# Altium PCB PCB_fcvv01.PcbDoc
Units mm, origin at the board's own origin, x right, y up, seen from the top; angles counter-clockwise.
Board outline 65.04 x 65.05 mm, 4 copper layers (Top Layer, GND_TOP, GND_BOT, Bottom Layer), stack 1.586 mm thick; 65 components, 57 nets, 269 pads, 4 vias.
Unrouted connection lines stored in the file: 144.
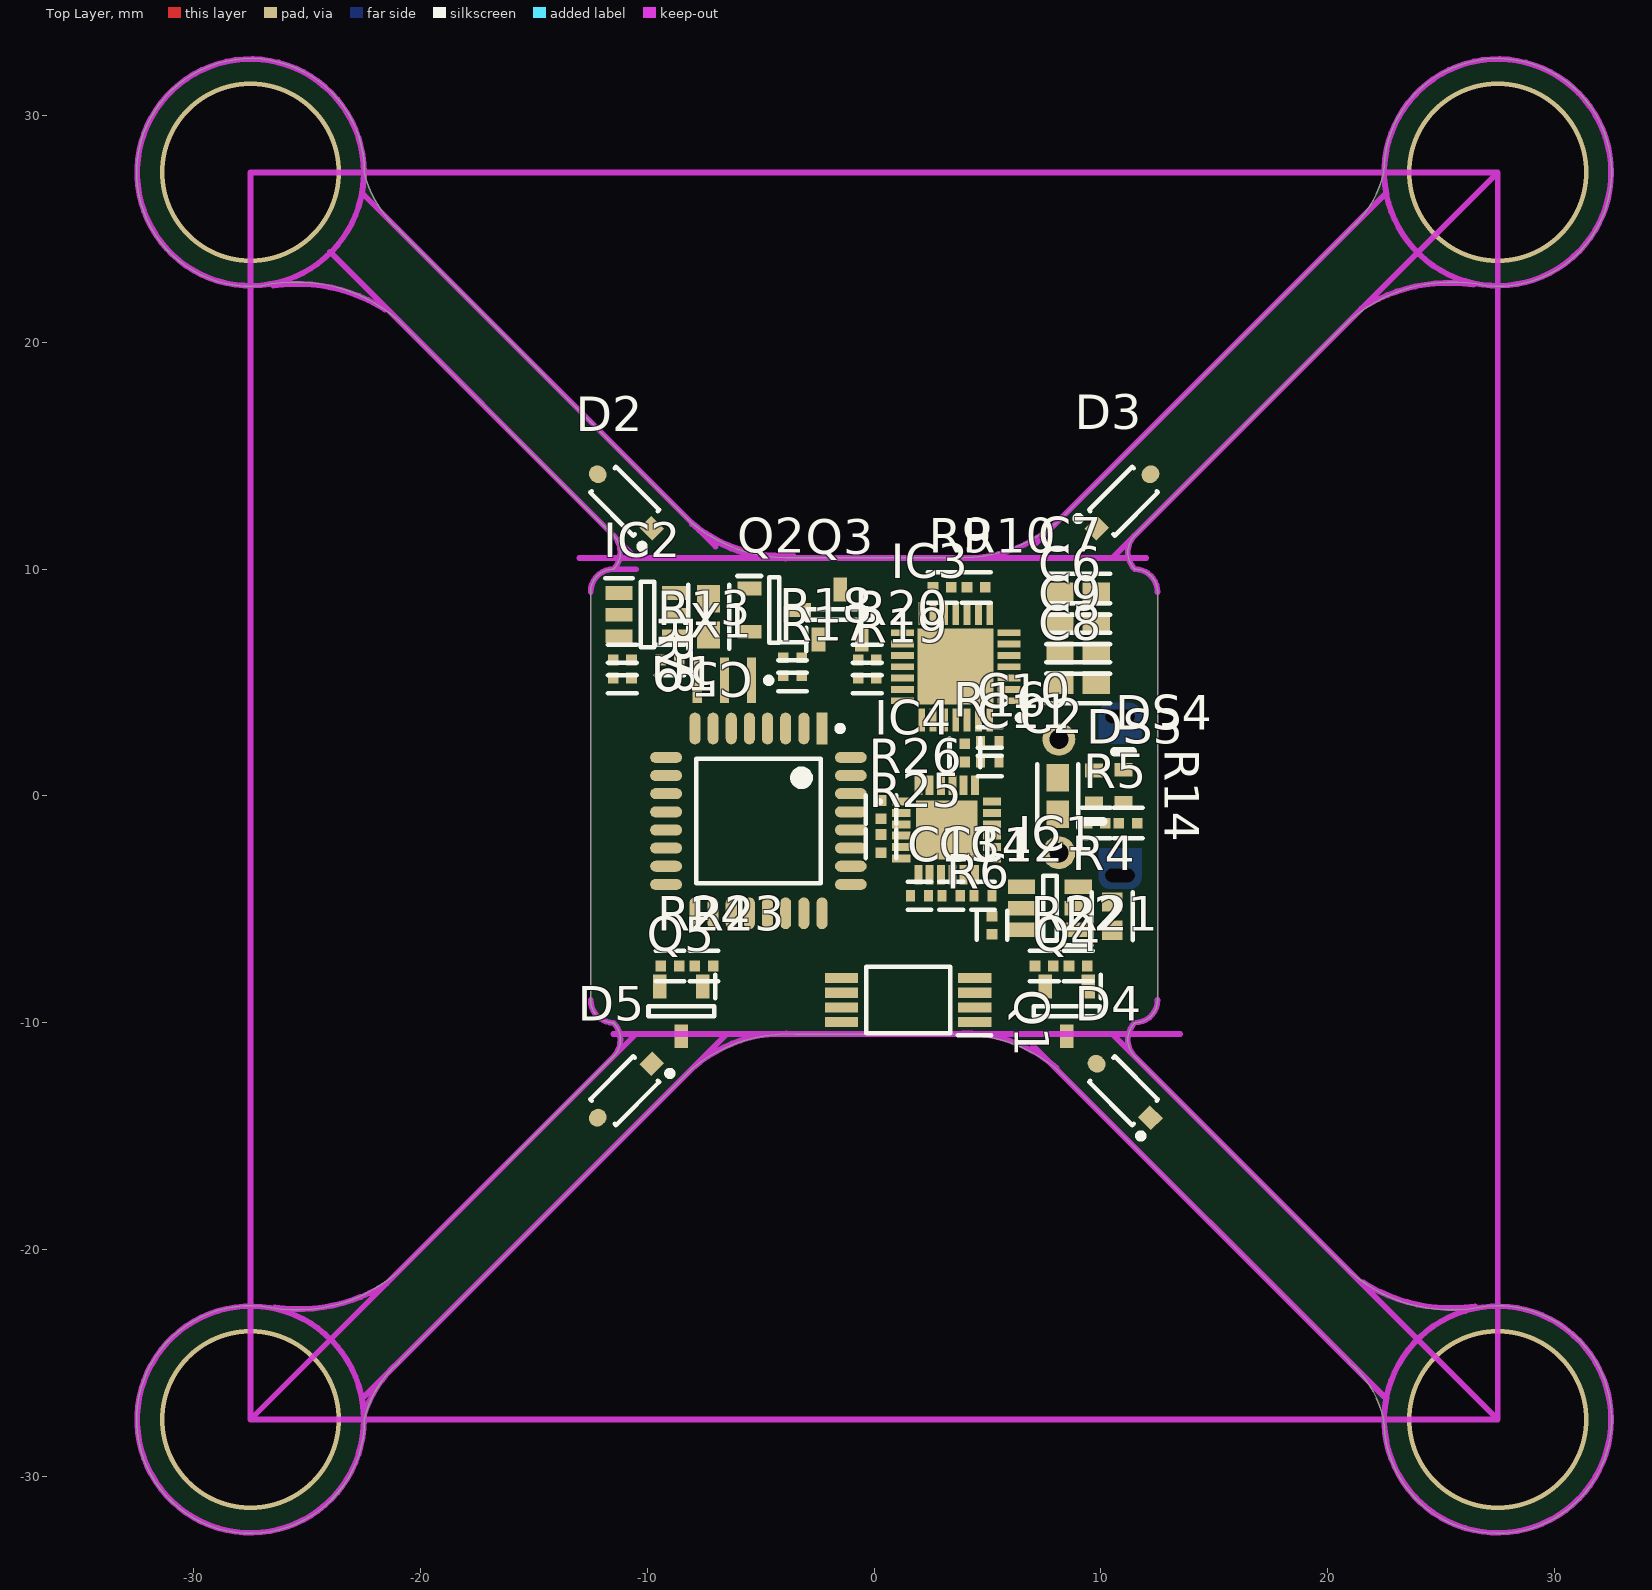
[diagram p0: Top Layer view]
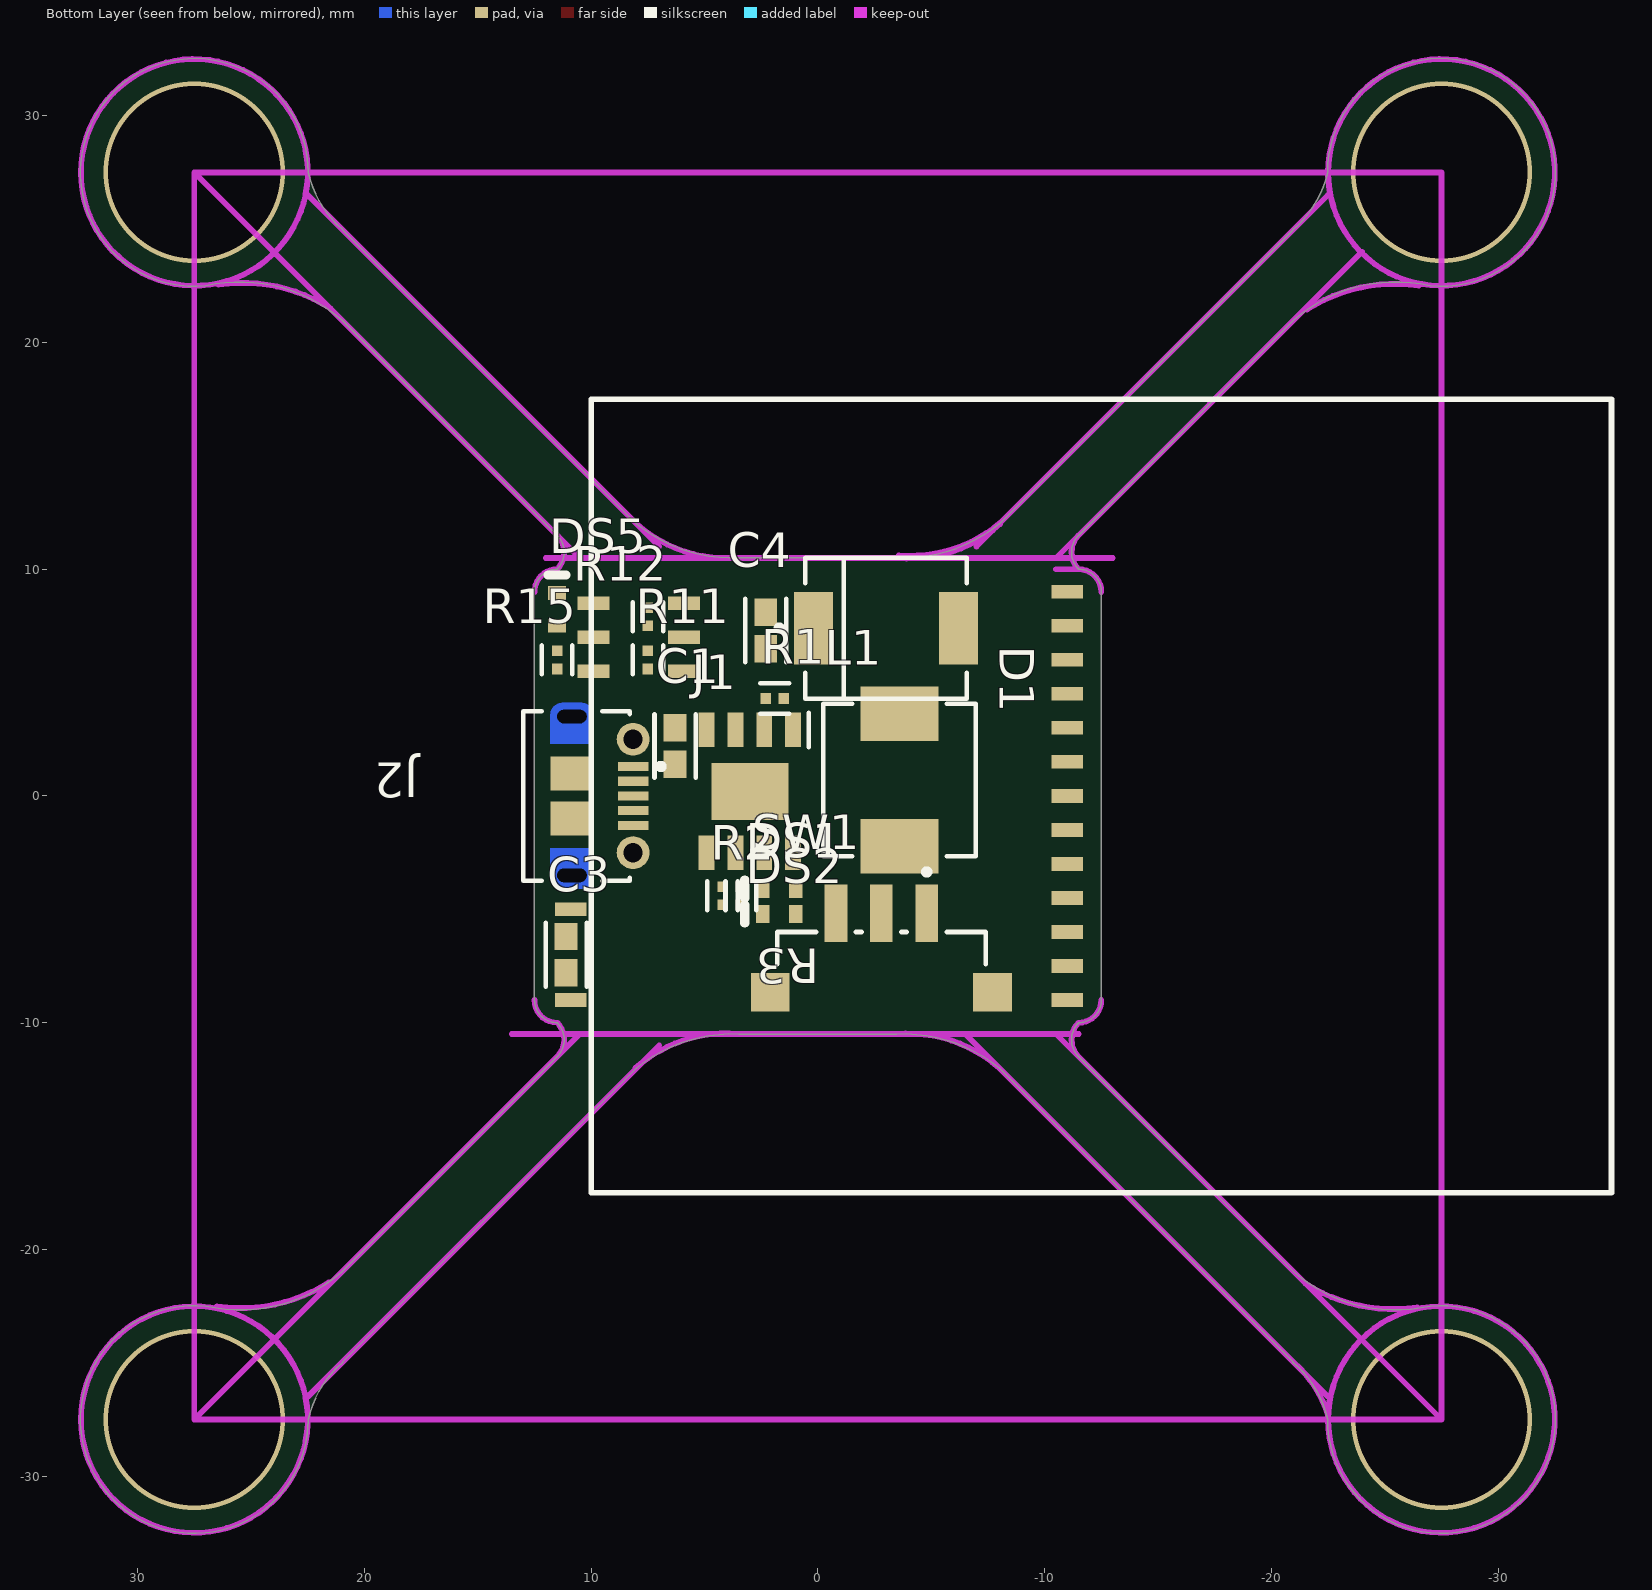
[diagram p1: Bottom Layer view, seen from below]
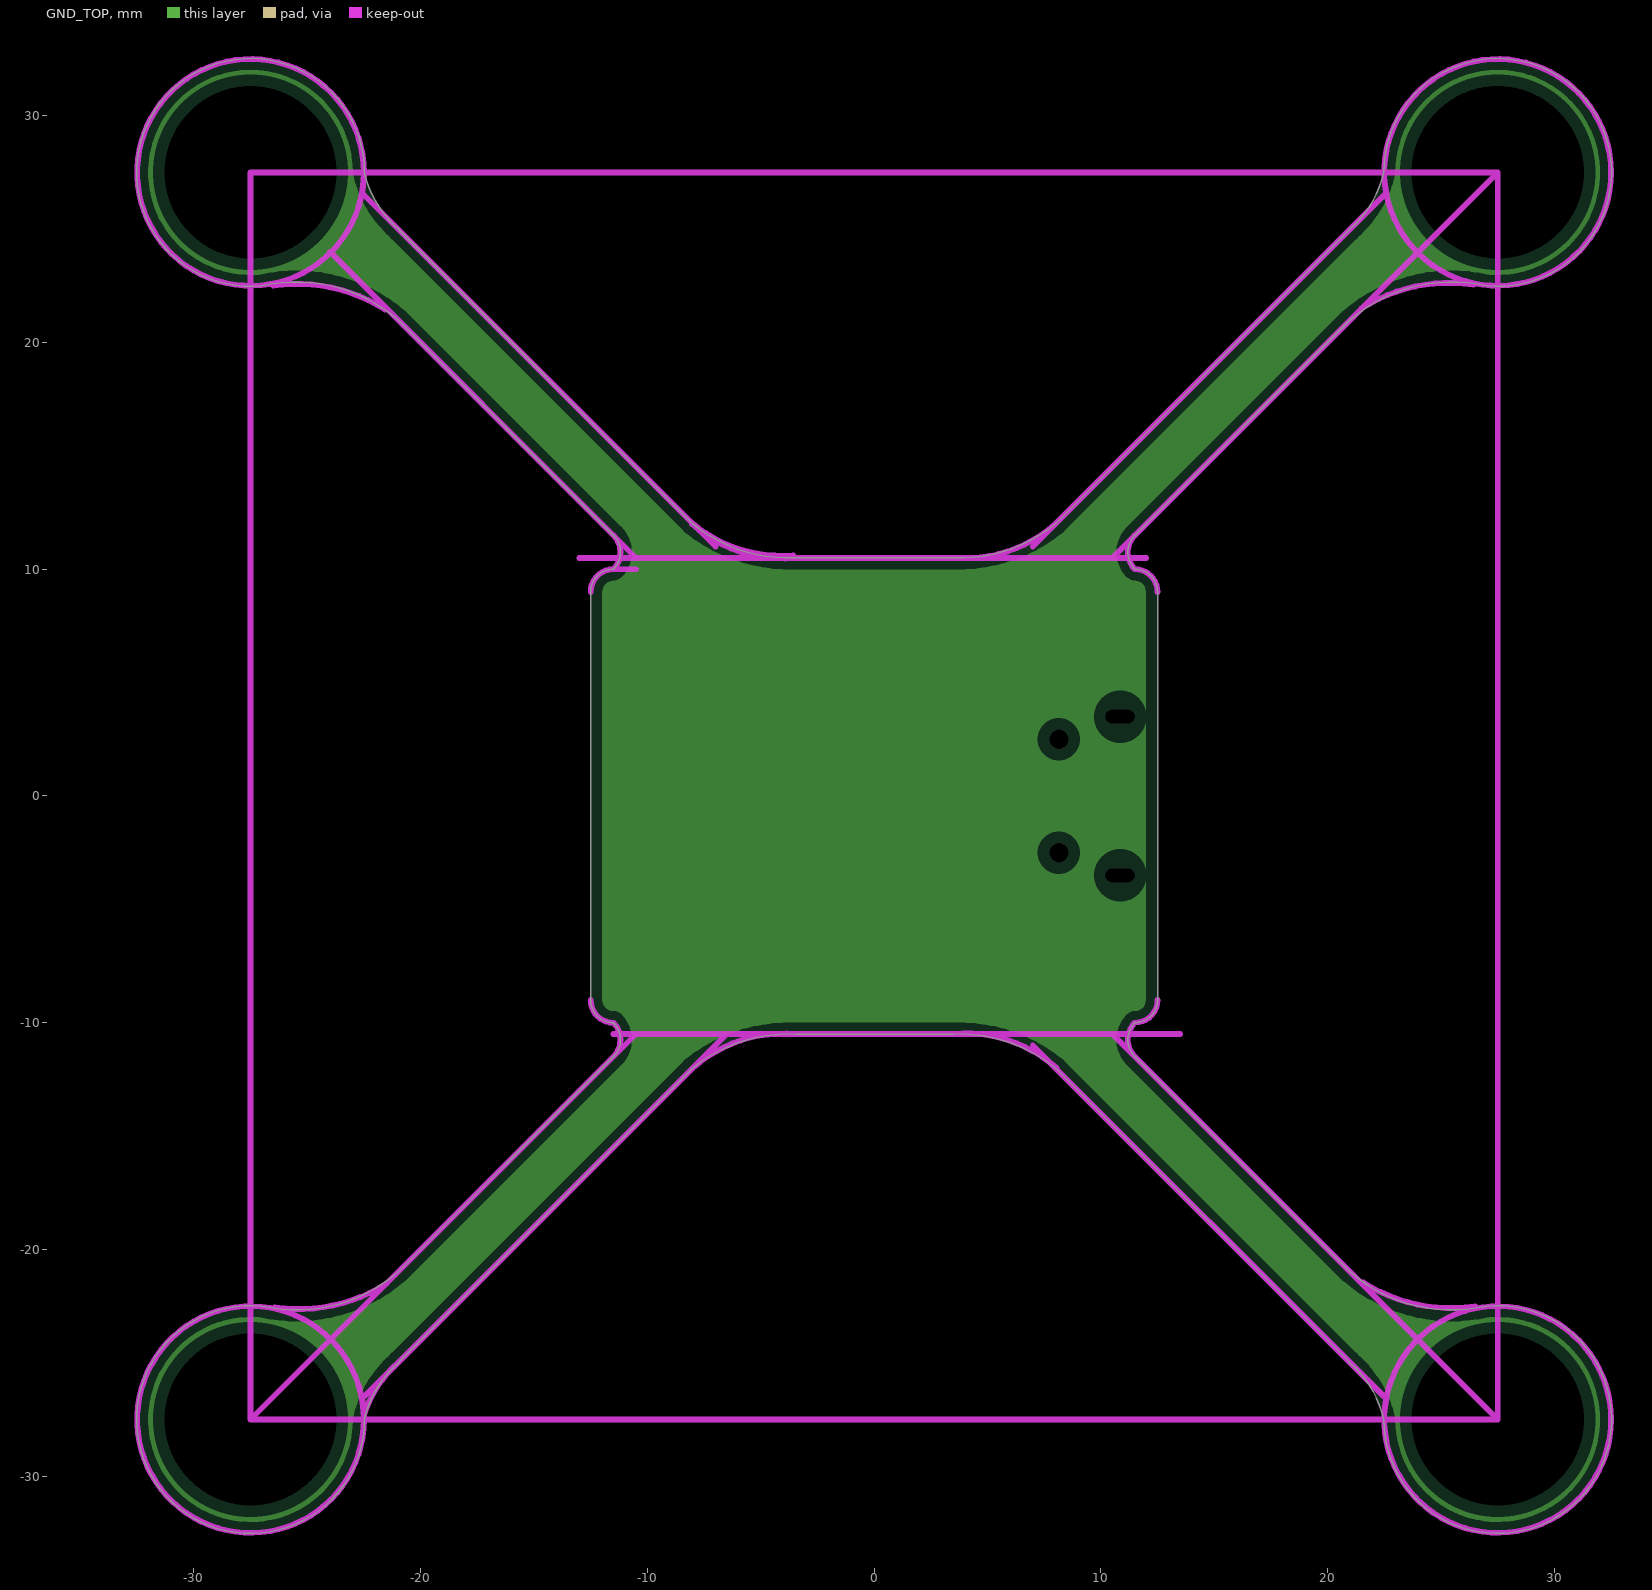
[diagram p2: GND_TOP, clearances drawn from the general rule]
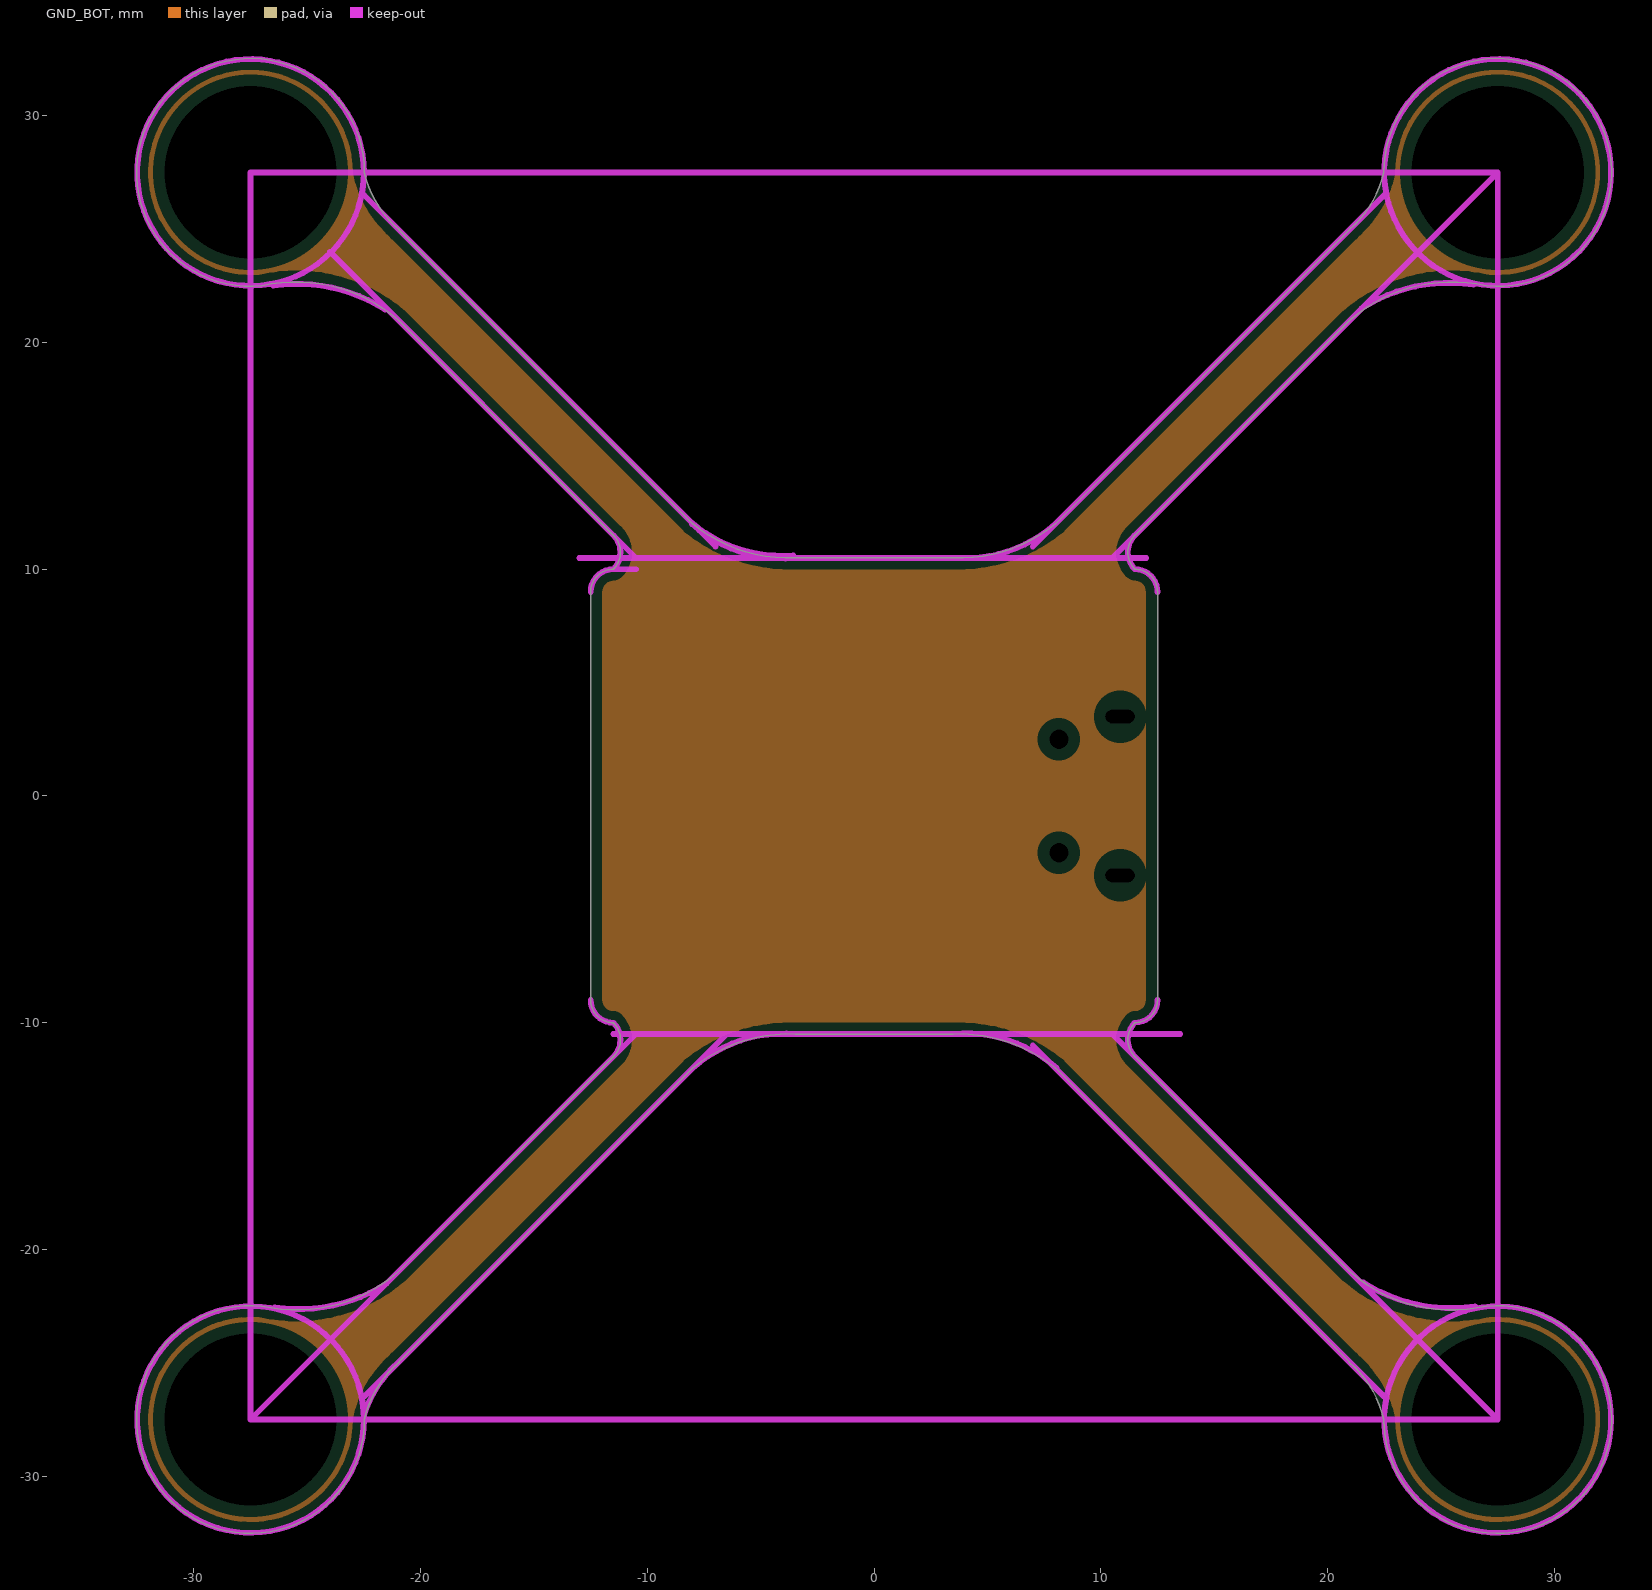
[diagram p3: GND_BOT, clearances drawn from the general rule]

## Layer stack, top to bottom
Top Solder: solder mask 0.012, Solder Resist, Dk 3.8
Top Layer: signal copper 0.035
Dielectric 2: prepreg 0.2104, PP-006, Dk 4.6
GND_TOP: plane copper 0.0152, net GND
Dielectric 1: dielectric 1.065, FR-4, Dk 4.6
GND_BOT: plane copper 0.0152, net GND
Dielectric 3: prepreg 0.2104, PP-006, Dk 4.6
Bottom Layer: signal copper 0.035
Bottom Solder: solder mask 0.012, Solder Resist, Dk 3.8

## Board outline
-27,-22.5 ccw(c-27.5,-27.5) -22.475,-27.5 cw(c-17.988,-28.488) -20.945,-24.971 -20.945,-24.945 -8,-12 cw(c-3.75,-17.25) -3.48,-10.501 3.48,-10.501 cw(c3.75,-17.25) 8,-12 20.945,-24.945 20.945,-24.971 cw(c17.988,-28.488) 22.475,-27.5 ccw(c27.5,-27.5) 27,-22.5 cw(c25.488,-15.804) 21.001,-20.999 21,-21 11.5,-11.5 cw(c12.25,-10.75) 11.5,-10 ccw(c11.5,-9) 12.5,-9 12.5,9 ccw(c11.5,9) 11.5,10 cw(c12.25,10.75) 11.5,11.5 21,21 21.001,20.999 cw(c25.488,15.804) 27,22.5 ccw(c27.5,27.5) 22.475,27.5 cw(c17.988,28.488) 20.945,24.971 20.945,24.945 8,12 cw(c3.75,17.25) 3.48,10.501 -3.48,10.501 cw(c-3.75,17.25) -8,12 -20.945,24.945 -20.945,24.971 cw(c-17.988,28.488) -22.475,27.5 ccw(c-27.5,27.5) -27,22.5 cw(c-25.488,15.804) -21.001,20.999 -21,21 -11.5,11.5 cw(c-12.25,10.75) -11.5,10 ccw(c-11.5,9) -12.5,9 -12.5,-9 ccw(c-11.5,-9) -11.5,-10 cw(c-12.25,-10.75) -11.5,-11.5 -21,-21 -21.001,-20.999 cw(c-25.488,-15.804)

## Design rules (kind name [scope] priority, off if disabled: settings)
Clearance [All] p1: gap=0.254 ignorepadtopadclearanceinfootprint=FALSE except(0: Arc-Hole Track-Hole SMDPad-Hole THPad-Hole Via-Hole Fill-Hole Poly-Hole Region-Hole Text-Hole; 0.1: Arc-Arc Arc-Track Track-Track; 0.127: SMDPad-SMDPad; 0.15: Arc-Text Track-Text SMDPad-Text THPad-Text Via-Text Fill-Text Poly-Text Region-Text Text-Text; 0.2: Arc-THPad Track-THPad)
PlaneClearance [All] p1: clearance=0.508
PlaneConnect [All] p1: planeconnectstyle=Direct reliefexpansion=0.508 reliefentries=4 reliefconductorwidth=0.254 reliefairgap=0.254
PolygonConnect [All] p1: connectstyle=Relief reliefconductorwidth=0.254 reliefentries=4 polygonreliefangle="90 Angle" airgapwidth=0.254
RoutingVias [All] p1: holewidth=0.3 width=0.6 viastyle="Through Hole" minholewidth=0.2 minwidth=0.4 maxholewidth=0.3 maxwidth=0.6
SolderMaskExpansion [All] p1: expansion=0.102 istentingtop=FALSE
Width HF_Signal [InNet('3V3')] p1: maxlimit=0.355 minlimit=0.355 preferedwidth=0.355 impedanceprofiledriven=TRUE impedanceprofileid={313EAB53-34BB-4FBF-9EF5-5980CF7794D0} impedanceprofilevalue=50.000000 minimp=50.000000 maximp=50.000000 favimp=50.000000
Width Power [(InNet('BAT') AND InNet('GND') AND InNet('NetD1_1') AND InNet('NetD2_1') AND InNet('NetR4_2') AND InNet('VBUS') AND InNet('VBUS_INT'))] p2: maxlimit=0.3 minlimit=0.3 preferedwidth=0.3
Width [(InNet('CHR_CHR') AND InNet('CHR_SBY') AND InNet('3V3'))] p3: maxlimit=0.2 minlimit=0.1 preferedwidth=0.12 minimp=50.000000 maximp=50.000000 favimp=50.000000
28 further rules are at their usual default settings.

## Classes and differential pairs
net class small_power_signal: CHR_CHR CHR_PROG CHR_SBY NetDS1_2 NetDS2_2 NetDS3_2 PROT_CS PROT_OC PROT_OD uC_DTR uc_IND_1 uc_IND_2 uc_RESET
net class Power: 3V3 BAT_N BAT_P GND MOTOR_NEG_1 MOTOR_NEG_2 MOTOR_NEG_3 MOTOR_NEG_4 NetC14_2

## Components (designator, comment, footprint, x,y, rotation, side; value= is the part's Value field where it differs from the comment)
C1 "10uF" FP-GRM188-0_1-e0_2_0_55-IPC_A 6.3,2.2 r270 bottom
C2 "10uF" FP-GRM188-0_1-e0_2_0_55-IPC_A 8.1,0 r90 top
C3 "10uF" FP-GRM188-0_1-e0_2_0_55-IPC_A 11.1,-7 r90 bottom
C4 "22uF" FP-GRM188-0_1-e0_2_0_55-IPC_A 2.3,7.3 r270 bottom
C5 "22uF" FP-GRM188-0_1-e0_2_0_55-IPC_A -7.3,7.9 r90 top
C6 "4.7uF" FP-GRM188-0_1-e0_2_0_55-IPC_A 9,7.6 r0 top
C7 "0.1uF" FP-GRM188-0_1-e0_2_0_55-IPC_A 9,8.9 r0 top
C8 "4.7uF" FP-GRM188-0_1-e0_2_0_55-IPC_A 8.998,5 r0 top
C9 "0.1uF" FP-GRM188-0_1-e0_2_0_55-IPC_A 9,6.3 r0 top
C10 "0.1uF" FP-GRM15-MFG 5.1,2.4 r0 top value=0.10μF
C11 "2.2uF" FP-GRM15-MFG 5.1,1.5 r0 top value=0.10μF
C12 "0.1uF" FP-GRM15-MFG 4.8,-4.4 r0 top value=0.10μF
C13 "10nF" FP-GRM15-MFG 2,-4.4 r0 top value=0.10μF
C14 "0.1uF" FP-GRM15-MFG 3.4,-4.4 r180 top value=0.10μF
D1 "SS34-E3/57T" FP-95402-MFG -3,7.4 r180 bottom
D2 "1N58419" FP-425-04-IPC_C -11,13 r135 top
D3 "1N58419" FP-425-04-IPC_C 11,13 r45 top
D4 "1N58419" FP-425-04-IPC_C 11,-13 r135 top
D5 "1N58419" FP-425-04-IPC_C -11,-13 r225 top
DS1 "GREEN" VISH-TLMX1100_V 1.7,-4.1 r0 bottom
DS2 "RED" VISH-TLMX1100_V 1.7,-5.2 r0 bottom
DS3 "RED" VISH-TLMX1100_V 9.7,0.4 r270 top
DS4 "RED" VISH-TLMX1100_V 11,0.425 r90 top
DS5 "RED" VISH-TLMX1100_V 11.5,8.225 r90 bottom
IC1 "DW01A-G" SOT95P280X135-6N 7.75,-4.95 r180 top
IC2 "MT3608" SOT95P280X145-6N -10,8 r0 top
IC3 "CP2102" QFN50P500X500X100-29N-D 3.6,5.7 r180 top
IC4 "MPU-6050" MPU6050 3.2,-1.5 r0 top
J1 "TP4056" SOIC127P600X175-9N 3,0.2 r270 bottom
J2 "105017-0001" USB-MICRO-B_V 9.5,0 r270 bottom locked
L1 "IHLP2525CZER220M11" FP-IHLP-2525CZ-FP_2_413x3-MFG -3.6,0.7 r90 bottom
Q1 "FS8205A" SOP65P640X120-8N 1.5,-9 r180 top
Q2 "SI2302DS" SOT95P230X110-3N -4.4,8.2 r0 top
Q3 "SI2302DS" SOT95P230X110-3N -1.5,8 r90 top
Q4 "SI2302DS" SOT95P230X110-3N 8.5,-9.5 r270 top
Q5 "SI2302DS" SOT95P230X110-3N -8.5,-9.5 r270 top
R1 "2K" FP-CRCW0402-e3-IPC_C 1.9,4.3 r180 bottom
R2 "220R" FP-CRCW0402-e3-IPC_C 4.2,-4.4 r270 bottom
R3 "220R" FP-CRCW0402-e3-IPC_C 3.4,-4.4 r270 bottom
R4 "2K" FP-ERA3A-IPC_C 10.5,-5.3 r90 top
R5 "220R" FP-CRCW0402-e3-IPC_C 9.8,-1.2 r180 top
R6 "470R" FP-CRCW0402-e3-IPC_C 5.2,-5.7 r90 top
R7 "7.5K" FP-CRCW0402-e3-IPC_C -11.1,6 r0 top
R8 "1K" FP-CRCW0402-e3-IPC_C -11.1,5.2 r0 top
R9 "22.1K" FP-CRCW0402-e3-IPC_C 3.002,9.2 r180 top
R10 "47.5K" FP-CRCW0402-e3-IPC_C 4.5,9.2 r0 top
R11 "1K" FP-CRCW0402-e3-IPC_C 7.5,6 r270 bottom
R12 "1K" FP-CRCW0402-e3-IPC_C 7.5,7.902 r90 bottom
R13 "1K" FP-CRCW0402-e3-IPC_C -9,6 r0 top
R14 "220R" FP-CRCW0402-e3-IPC_C 11.2,-1.2 r0 top
R15 "220R" FP-CRCW0402-e3-IPC_C 11.5,6 r90 bottom
R16 "10K" FP-CRCW0402-e3-IPC_C 4,1.9 r270 top
R17 "500R" FP-CRCW0402-e3-IPC_C -3.6,5.3 r180 top
R18 "47.5K" FP-CRCW0402-e3-IPC_C -3.598,6.1 r180 top
R19 "500R" FP-CRCW0402-e3-IPC_C -0.3,5.2 r180 top
R20 "47.5K" FP-CRCW0402-e3-IPC_C -0.3,6 r180 top
R21 "500R" FP-CRCW0402-e3-IPC_C 9,-7.5 r0 top
R22 "47.5K" FP-CRCW0402-e3-IPC_C 7.5,-7.5 r0 top
R23 "500R" FP-CRCW0402-e3-IPC_C -7.5,-7.5 r0 top
R24 "47.5K" FP-CRCW0402-e3-IPC_C -9,-7.5 r0 top
R25 "4.7k" FP-CRCW0402-e3-IPC_C 0.3,-2.1 r90 top
R26 "4.7k" FP-CRCW0402-e3-IPC_C 0.3,-0.6 r270 top
SW1 "SS312SAH4-R" FP-SS312SAH4-R-MFG -2.8,-8 r90 bottom
U1 "ATMEGA328P-AUR" FP-32A-IPC_C -5.1,-1.1 r270 top
X1 "CSTCE8M00G55-R0" MURA-CSTCE_G_A-3_V -6.6,5.1 r180 top

## Footprints (in the part's own frame and the unit in brackets; to place one, negate y for a bottom-side part, rotate by r counter-clockwise, add the part's x,y. Pads: shape width x height; smd on the part's side, far side on the other; paste and mask are expansions set on the pad)
FP-32A-IPC_C [mm]
  rect 1.404x0.486 smd paste+0 mask+0: 1(-4.075,2.8)
  rrect100% 1.404x0.486 smd paste+0 mask+0: 2(-4.075,2) 3(-4.075,1.2) 4(-4.075,0.4) 5(-4.075,-0.4) 6(-4.075,-1.2) 7(-4.075,-2) 8(-4.075,-2.8) 17(4.075,-2.8) 18(4.075,-2) 19(4.075,-1.2) 20(4.075,-0.4) 21(4.075,0.4) 22(4.075,1.2) 23(4.075,2) 24(4.075,2.8)
  rrect100% 0.486x1.404 smd paste+0 mask+0: 9(-2.8,-4.075) 10(-2,-4.075) 11(-1.2,-4.075) 12(-0.4,-4.075) 13(0.4,-4.075) 14(1.2,-4.075) 15(2,-4.075) 16(2.8,-4.075) 25(2.8,4.075) 26(2,4.075) 27(1.2,4.075) 28(0.4,4.075) 29(-0.4,4.075) 30(-1.2,4.075) 31(-2,4.075) 32(-2.8,4.075)
  silkscreen extent -4.2,-2.75 2.75,3.73, body extent -4.88,-4.88 4.88,4.88, height 0.25
FP-425-04-IPC_C [mm]
  rect 0.808x0.742 smd paste+0 mask+0: 1(-1.68,0)
  rrect100% 0.808x0.742 smd paste+0 mask+0: 2(1.68,0)
  silkscreen extent -2.07,-0.8 1.35,1, body extent -2.18,-0.9 2.18,0.9, height 0.25
FP-95402-MFG [mm]
  rect 1.72x3.2 smd paste+0 mask+0: 1(-3.205,0) 2(3.205,0)
  silkscreen extent -4.83,-3.11 3.55,3.11, body extent -3.97,-2.95 3.97,2.95, height 2.62
FP-CRCW0402-e3-IPC_C [mm]
  rect 0.468x0.472 smd paste+0 mask+0: 1(-0.402,0) 2(0.402,0)
  silkscreen extent -0.64,-0.67 0.64,0.67, body extent -0.5,-0.25 0.5,0.25, height 0.4
FP-ERA3A-IPC_C [mm]
  rect 0.855x0.906 smd paste+0 mask+0: 1(-0.626,0) 2(0.626,0)
  silkscreen extent -1.05,-0.9 1.05,0.9, body extent -0.8,-0.4 0.8,0.4, height 0.55
FP-GRM15-MFG [mm]
  rect 0.4x0.5 smd paste+0 mask+0: 1(-0.4,0) 2(0.4,0)
  silkscreen extent -0.53,-0.63 0.53,0.63, body extent -0.7,-0.38 0.7,0.38, height 0.25
FP-GRM188-0_1-e0_2_0_55-IPC_A [mm]
  rect 1.208x1.012 smd paste+0 mask+0: 1(-0.802,0) 2(0.802,0)
  silkscreen extent -1.41,-0.91 1.41,0.91, body extent -0.8,-0.4 0.8,0.4, height 0.9
FP-IHLP-2525CZ-FP_2_413x3-MFG [mil]
  rect 95x135 smd paste+0 mask+0: 1(-115,0) 2(115,0)
  silkscreen extent -132,-132 132,132, body extent -135,-127 135,127, height 118
FP-SS312SAH4-R-MFG [mm]
  rect 2.55x1 smd paste+0 mask+0: 1(2.825,-2) 2(2.825,0) 3(2.825,2)
  rect 1.7x1.7 smd paste+0 mask+0: 4(-0.65,4.9) 5(-0.65,-4.9)
  silkscreen extent 0.58,-4.6 4.77,4.6, body extent -4,-5.25 3.4,5.25, height 2.9
MPU6050 [mm]
  rect 0.8x0.35 smd: 1(-2,1.25) 2(-2,0.75) 3(-2,0.25) 4(-2,-0.25) 5(-2,-0.75) 6(-2,-1.25) 13(2,-1.25) 14(2,-0.75) 15(2,-0.25) 16(2,0.25) 17(2,0.75) 18(2,1.25)
  rect 0.35x0.85 smd: 7(-1.25,-1.975) 8(-0.75,-1.975) 9(-0.25,-1.975) 10(0.25,-1.975) 11(0.75,-1.975) 12(1.25,-1.975) 19(1.25,1.975) 20(0.75,1.975) 21(0.25,1.975) 22(-0.25,1.975) 23(-0.75,1.975) 24(-1.25,1.975)
  rect 2.7x2.6 smd: 25(0,0)
  silkscreen extent -3,1.2 -2.9,1.3, body extent -2,-2 2,2, height 0.88
MURA-CSTCE_G_A-3_V [mm] "SMD, 3-Leads, Body 3.2x1.3mm, Pitch 1.2mm"
  rect 0.4x2 smd: 1(-1.2,0) 2(0,0) 3(1.2,0)
  silkscreen extent -2.08,-0.12 -1.83,0.12, body extent -1.6,-0.65 1.6,0.65, height 0.7
QFN50P500X500X100-29N-D [mm]
  rect 1x0.3 smd: 1(-2.35,1.5) 2(-2.35,1) 3(-2.35,0.5) 4(-2.35,0) 5(-2.35,-0.5) 6(-2.35,-1) 7(-2.35,-1.5) 15(2.35,-1.5) 16(2.35,-1) 17(2.35,-0.5) 18(2.35,0) 19(2.35,0.5) 20(2.35,1) 21(2.35,1.5)
  rect 0.3x1 smd: 8(-1.5,-2.35) 9(-1,-2.35) 10(-0.5,-2.35) 11(0,-2.35) 12(0.5,-2.35) 13(1,-2.35) 14(1.5,-2.35) 22(1.5,2.35) 23(1,2.35) 24(0.5,2.35) 25(0,2.35) 26(-0.5,2.35) 27(-1,2.35) 28(-1.5,2.35)
  rect 3.35x3.35 smd: 29(0,0)
  silkscreen extent -2.98,2.13 -2.73,2.37, body extent -2.55,-2.55 2.55,2.55, height 1
SOIC127P600X175-9N [mm]
  rect 1.525x0.7 smd: 1(-2.712,1.905) 2(-2.712,0.635) 3(-2.712,-0.635) 4(-2.712,-1.905) 5(2.712,-1.905) 6(2.712,-0.635) 7(2.712,0.635) 8(2.712,1.905)
  rect 2.513x3.402 smd: 9(0,0)
  silkscreen extent -3.47,2.61 -1.95,2.61, body extent -3,-2.45 3,2.45, height 1.75
SOP65P640X120-8N [mm]
  rect 1.475x0.45 smd: 1(-2.938,0.975) 2(-2.938,0.325) 3(-2.938,-0.325) 4(-2.938,-0.975) 5(2.938,-0.975) 6(2.938,-0.325) 7(2.938,0.325) 8(2.938,0.975)
  silkscreen extent -3.67,-1.47 1.85,1.55, body extent -3.2,-1.47 3.2,1.47, height 1.2
SOT95P230X110-3N [mm]
  rect 1.05x0.6 smd: 1(-1.1,0.95) 2(-1.1,-0.95) 3(1.1,0)
  silkscreen extent -1.63,-1.45 0.23,1.5, body extent -1.2,-1.45 1.2,1.45, height 0.95
SOT95P280X135-6N [mm]
  rect 1.2x0.65 smd: 1(-1.25,0.95) 2(-1.25,0) 3(-1.25,-0.95) 4(1.25,-0.95) 5(1.25,0) 6(1.25,0.95)
  silkscreen extent -1.85,-1.43 0.3,1.63, body extent -1.4,-1.43 1.4,1.43, height 1.35
SOT95P280X145-6N [mm]
  rect 1.2x0.6 smd: 1(-1.25,0.95) 2(-1.25,0) 3(-1.25,-0.95) 4(1.25,-0.95) 5(1.25,0) 6(1.25,0.95)
  silkscreen extent -1.85,-1.45 0.3,1.6, body extent -1.4,-1.45 1.4,1.45, height 1.45
USB-MICRO-B_V [mm] "USB, MICRO B, Body 7.491x4.695 mm, Pitch 0.65 mm"
  rect 0.4x1.35 smd: 1(-1.3,1.35) 2(-0.65,1.35) 3(0,1.35) 4(0.65,1.35) 5(1.3,1.35)
  round 1.45 hole 0.85: 6(-2.5,1.35) 7(2.5,1.35)
  rrect50% 0x0 hole 0.6 slot 1.3 at 90 deg: 8(-3.5,-1.35) 11(3.5,-1.35)
  rect 1.5x1.9 smd: 9(-1,-1.35) 10(1,-1.35)
  Top Layer circle w0.5: c3.6,-0.9 r0.25
  Top Layer circle w0.5: c3.6,-1.8 r0.25
  Top Layer circle w0.5: c-3.6,-0.9 r0.25
  Top Layer circle w0.5: c-3.6,-1.8 r0.25
  Top Layer region: -2.3,-2.3 -2.3,-0.4 -3.6,-0.4 -3.6,-2.3
  Top Layer region: 2.3,-0.4 2.3,-2.3 3.6,-2.3 3.6,-0.4
  Top Layer region: 3.6,-0.9 3.6,-1.8 4.1,-1.8 4.1,-0.9
  Top Layer region: -3.6,-1.8 -3.6,-0.9 -4.1,-0.9 -4.1,-1.8
  silkscreen extent -3.75,-3.5 3.75,2.7, body extent -4.1,-3.9 4.1,1.5, height 2.67
VISH-TLMX1100_V [mm] "SMD, 2-Leads, Body 1.6x0.8mm"
  rect 0.6x0.8 smd: 1(-0.725,0) 2(0.725,0)
  silkscreen extent 1.53,-0.4 1.53,0.4, body extent -0.8,-0.4 0.8,0.4, height 0.65

## Part data
C1 C2: library part CMP-2006-02792-2, "10uF 0603", Case Code (Imperial)=0603, Case Code (Metric)=1608, Dielectric=X5R, Max Operating Temperature=85°C, Min Operating Temperature=-55°C, Package Quantity=4000, Tolerance=20%, Voltage=6.3V, Capacitance=10uF, Case/Package=0603, Depth=0.8mm, Height=0.8mm, Lead Free="Lead Free", Length=1.6mm, Material=Ceramic, Mount="Surface Mount", Packaging="Tape and Reel", Radiation Hardening=No, REACH SVHC="No SVHC", Termination=SMD/SMT, Thickness=0.035inch, Voltage Rating=6.3V, Voltage Rating (DC)=6.3V, Width=0.031inch
C3: library part CMP-2006-02792-2, "0603", Case Code (Metric)=1608, Dielectric=X5R, Max Operating Temperature=85°C, Min Operating Temperature=-55°C, Package Quantity=4000, Tolerance=20%, Voltage=6.3V, Capacitance=10uF, Case Code (Imperial)=0603, Case/Package=0603, Depth=0.8mm, Height=0.8mm, Lead Free="Lead Free", Length=1.6mm, Material=Ceramic, Mount="Surface Mount", Packaging="Tape and Reel", Radiation Hardening=No, REACH SVHC="No SVHC", Termination=SMD/SMT, Thickness=0.035inch, Voltage Rating=6.3V, Voltage Rating (DC)=6.3V, Width=0.031inch
C4 C5: library part CMP-2006-02792-2, "10uF 0603", Capacitance=10uF, Case Code (Imperial)=0603, Case Code (Metric)=1608, Dielectric=X5R, Max Operating Temperature=85°C, Min Operating Temperature=-55°C, Package Quantity=4000, Tolerance=20%, Voltage=6.3V, Case/Package=0603, Depth=0.8mm, Height=0.8mm, Lead Free="Lead Free", Length=1.6mm, Material=Ceramic, Mount="Surface Mount", Packaging="Tape and Reel", Radiation Hardening=No, REACH SVHC="No SVHC", Termination=SMD/SMT, Thickness=0.035inch, Voltage Rating=6.3V, Voltage Rating (DC)=6.3V, Width=0.031inch
C6 C7 C8 C9: library part CMP-2006-02792-2, "0603", Capacitance=10uF, Case Code (Metric)=1608, Dielectric=X5R, Max Operating Temperature=85°C, Min Operating Temperature=-55°C, Package Quantity=4000, Tolerance=20%, Voltage=6.3V, Case Code (Imperial)=0603, Case/Package=0603, Depth=0.8mm, Height=0.8mm, Lead Free="Lead Free", Length=1.6mm, Material=Ceramic, Mount="Surface Mount", Packaging="Tape and Reel", Radiation Hardening=No, REACH SVHC="No SVHC", Termination=SMD/SMT, Thickness=0.035inch, Voltage Rating=6.3V, Voltage Rating (DC)=6.3V, Width=0.031inch
C10 C11 C12 C13 C14: library part CMP-2100-03641-2, "CAP CER 0.1UF 16V X7R 0402", Capacitance=0.10μF, Manufacturer=Murata, Manufacturer Part Number=GRM155R71C104KA88D, Package=GRM15, Temperature="-55°C to +125°C", Temperature Characteristic=X7R, Temperature Range High=+125°C, Temperature Range Low=-55°C, Tolerance=10%, Voltage Rating=16Vdc, Category=Cap, ComponentLink2Description=Datasheet, ComponentLink2URL=https://search.murata.co.jp/Ceramy/image/img/A01X/G101/ENG/GRM155R71H471KA01-01A.pdf, Device Class L1="Passive Components", Device Class L2=Capacitors, Device Class L3="Ceramic Capacitors", Digikey Description="CAP CER 0.1UF 16V X7R 0402", Height=0.55mm, Ipc Land Pattern Name=CAPC10050X219, Lead Free=yes, Material=Ceramic, Mouser Description="0402 0.1 uF 16V ±10 % Tolerance X7R SMT Multilayer Ceramic Capacitor", Octopart=https://octopart.com/grm155r71c104ka88d-murata-196880, RoHS=TRUE, Standoff Height=0mm
D1: library part CMP-02539-000012-1, "DIODE SCHOTTKY 40V 3A DO214AB", Forward Current=3A, Manufacturer=Vishay, Max Junction Temp=+150°C, Max Repetitive Reverse Voltage=40V, Max Surge Forward Current=100A, Package=95402, Peak Reverse Current=0.5mA, Temperature="-55°C to +150°C", Temperature Range Low=-55°C, Automotive=No, Category=Diode, ComponentLink2Description=Datasheet, ComponentLink2URL=http://www.vishay.com/docs/88751/ss32.pdf, Device Class L1="Discrete Semiconductors", Device Class L2=Diodes, Device Class L3="Schottky Diodes", Digikey Description="DIODE SCHOTTKY 40V 3A DO214AB", Footprint Url=http://www.vishay.com/docs/95402/smc.pdf, Height=2.62mm, Lead Free=Yes, Manufacturer Part Number=SS34-E3/57T, Mouser Description="Schottky Diodes & Rectifiers 3.0 Amp 40 Volt", Octopart=https://octopart.com/ss34-e3%2F57t-vishay-39552907, RoHS=TRUE, Standoff Height=0mm, Temperature Range High=+150°C
D2 D3 D4 D5: library part CMP-1055-00425-2, "DIODE SCHOTTKY 20V 500MA SOD123", Average Rectified Current=500mA, Case/Package=SOD-123-2, Forward Voltage=385mV, Max Forward Surge Current (Ifsm)=5.5A, Max Operating Temperature=125°C, Max Repetitive Reverse Voltage (Vrrm)=20V, Max Reverse Leakage Current=250uA, Min Operating Temperature=-65°C, Package Quantity=3000, Contact Plating=Tin, Current Rating=500mA, Element Configuration=Single, Forward Current=500mA, Height=1.12mm, Lead Free="Lead Free", Length=2.69mm, Max Reverse Voltage (DC)=20V, Max Surge Current=5.5A, Number of Pins=2, Output Current=500mA, Packaging="Tape and Reel", Peak Non-Repetitive Surge Current=5.5A, Peak Reverse Current=250uA, Polarity=Standard, Radiation Hardening=No, REACH SVHC="No SVHC", Termination=SMD/SMT, Voltage Rating (DC)=20V, Width=1.6mm
DS1 DS2 DS3 DS4 DS5: library part CMP-1666-00027-1, "Red 0603 Light Emitting Diodes (LED) ROHS/NCD0603R1", Capacitance="12 pF", Case Code (Imperial)=0603, Case Code (Metric)=1608, Max Operating Temperature=125degC, Min Operating Temperature=-55degC, Package Quantity=4000, Resistance="100000000000 Ohm", Tolerance=5%, Type (Capacitors)=C0G, Voltage Rating="50 V", Case/Package=0603, ComponentLink1Description="Manufacturer URL", ComponentLink1URL=http://www.vishay.com/, ComponentLink2Description=Datasheet, ComponentLink2URL=http://www.vishay.com/docs/83173/tlmb1100.pdf, DatasheetVersion="Rev. 2.7, 03/2016", Height="0.8 mm", Length="1.6 mm", Mount="Surface Mount", PackageDescription="2-Pin Surface Mount Device, Body 1.6 x 0.8 mm", PackageReference=TLMX1100, Packaging="Tape and Reel", Pins=2, Radiation Hardening=No, REACH SVHC="No SVHC", RoHSCompliant=True, Voltage Rating (DC)="50 V", Width="0.8 mm"
IC1: "Integrated Circuit", Manufacturer_Name="Fortune Semiconductor Corporation", Datasheet Link=http://acoptex.com/uploads/DW01A.pdf, Height=1.35mm, Manufacturer_Part_Number=DW01A-G
IC2: "Integrated Circuit", Manufacturer_Name=Aerosemi, Datasheet Link=https://www.olimex.com/Products/Breadboarding/BB-PWR-3608/resources/MT3608.pdf, Height=1.45mm, Manufacturer_Part_Number=MT3608
IC3: "Integrated Circuit", Manufacturer_Name="Silicon Labs", Mouser Part Number=634-CP2102, Datasheet Link=https://componentsearchengine.com/Datasheets/1/CP2102.pdf, Height=1mm, Manufacturer_Part_Number=CP2102, Mouser Price/Stock=https://www.mouser.co.uk/ProductDetail/Silicon-Labs/CP2102?qs=ucY0lxHzU7615lOm95XT0w%3D%3D
IC4: "Integrated Circuit", Manufacturer_Name=TDK, Mouser Part Number=410-MPU-6050, Arrow Part Number=MPU-6050, Arrow Price/Stock=https://www.arrow.com/en/products/mpu-6050/invensense?region=nac, Datasheet Link=https://product.tdk.com/system/files/dam/doc/product/sensor/mortion-inertial/imu/data_sheet/mpu-6000-datasheet1.pdf, Height=0.95mm, Manufacturer_Part_Number=MPU-6050, Mouser Price/Stock=https://www.mouser.co.uk/ProductDetail/TDK-InvenSense/MPU-6050?qs=u4fy%2FsgLU9O14B5JgyQFvg%3D%3D
J1: "Connector", Manufacturer_Name="NanJing Top Power", Datasheet Link=https://dlnmh9ip6v2uc.cloudfront.net/datasheets/Prototyping/TP4056.pdf, Height=1.75mm, Manufacturer_Part_Number=TP4056
J2: library part CMP-2000-05827-1, "Micro-USB B Receptacle, Right Angle, Bottom Mount, Surface Mount, with Solder Tabs, -30 to 85 degC, 5-Pin USB, RoHS, Tape and Reel", Manufacturer=Molex, Package Description="5-Leads USB, Micro B, Body 7.5 x 5 mm, Pitch 0.65 mm", Package Reference=MICRO-B, Package Version="Rev. F, 12/2012", Standard Package=1, Voltage - Max=30V, 3D Model=105017-0001.stp, Catalog Drawings=1050170001, Category=Connectors,Interconnects, Circuits=5, Connector Type=USB-microB, Datasheet URL=http://www.molex.com/elqNow/elqRedir.htm?ref=http://www.molex.com/webdocs/datasheets/pdf/en-us/1050170001_IO_CONNECTORS.pdf, Datasheet Version=03/2016, Family=USB,DVI,HDMIConnectors, Featured Product=Micro-USBConnectorsUSBConnectors, Features=Shielded,SolderRetention, Gender=Receptacle, Ingress Protection=-, Manufacturer URL=http://www.molex.com/, Mating Products=WM17145-ND-CABLEMICROUSBBTOSTDA1.0MWM17147-ND-CABLEMICROUSBBTOSTDA2.0MWM17146-ND-CABLEMICROUSBBTOSTDA1.5M, Mounting Technology=SurfaceMount, Mounting Type=BoardCutout,SurfaceMount,RightAngle, Number of Contacts=5, Online Catalog=Molex-MicroUSB, Other Names=WM1399DKR, Package URL=http://www.molex.com/pdm_docs/sd/1050170001_sd.pdf, Packaging=Digi-Reel®, PCN Assembly/Origin=ResinSupplier21/Oct/2015, RoHS Information=1050170001CertofCompliance, Series=-, Specifications=-
L1: library part CMP-2000-06442-2, "Commercial Inductors, Low DCR Series 22uH 2.9A 135mΩ 20%", Case Code (Imperial)=2525, Case Code (Metric)=6363, Current Rating=2.9A, DC Resistance (DCR)=135mR, Inductance=22uH, Inductance Tolerance=20%, Max Operating Temperature=125°C, Min Operating Temperature=-55°C, Package Quantity=2000, Saturation Current=2.5A, Self Resonant Frequency=1MHz, Test Frequency=100kHz, Case/Package=2525, Contact Plating=Tin, Core Material=Ferrite, Depth=6.72mm, Height=3mm, Height - Seated (Max)=0.118inch, Lead Free="Lead Free", Length=7.24mm, Max DC Current=2.9A, Military Standard=Not, Mount="Surface Mount", Number of Pins=2, Packaging="Tape and Reel", Radiation Hardening=No, RMS Current (Irms)=2.9A, Shielding=Shielded, Termination=SMD/SMT, Tolerance=20%, Width=0.255inch
Q1: "Transistor", Manufacturer_Name="SII Semiconductor", Datasheet Link=http://www.ic-fortune.com/upload/Download/FS8205A-DS-12_EN.pdf, Height=1.2mm, Manufacturer_Part_Number=FS8205A
Q2 Q3 Q4 Q5: "MOSFET (N-Channel)", Manufacturer_Name=Nexperia, Mouser Part Number=N/A, Datasheet Link=https://assets.nexperia.com/documents/data-sheet/SI2302DS.pdf, Height=1.1mm, Manufacturer_Part_Number=SI2302DS, Mouser Price/Stock=https://www.mouser.com/Search/Refine.aspx?Keyword=N%2FA
R1: library part CMP-2002-08122-2, "62.5mW Thick Film Resistors 50V ±100ppm/℃ ±5% -55℃~+155℃ 2kΩ 0402 Chip Resistor - Surface Mount ROHS/CR-02JL6----2K", Case Code (Imperial)=0402, Case Code (Metric)=1005, Max Operating Temperature=155°C, Max Power Dissipation=63mW, Min Operating Temperature=-55°C, Package Quantity=1, Resistance=0mR, Temperature Coefficient=100ppm/°C, Tolerance=5%, Voltage Rating=50V, Case/Package=0402, Composition="Thick Film", Contact Plating=Tin, Depth=0.5mm, Features="Automotive AEC-Q200", Height=0.35mm, Lead Free="Lead Free", Length=1mm, Military Standard=Not, Mount="Surface Mount", Number of Terminations=2, Packaging="Tape and Reel", Power Rating=63mW, Radiation Hardening=No, Termination=SMD/SMT, Voltage Rating (DC)=50V, Weight=2.3E-05oz, Width=0.5mm
R2 R3 R5 R14 R15: library part CMP-2002-08122-2, "62.5mW Thick Film Resistors 50V ±100ppm/℃ ±1% -55℃~+155℃ 220Ω 0402 Chip Resistor - Surface Mount ROHS/RC0402FR-07220RL", Case Code (Imperial)=0402, Case Code (Metric)=1005, Max Operating Temperature=155°C, Max Power Dissipation=63mW, Min Operating Temperature=-55°C, Package Quantity=1, Resistance=0mR, Temperature Coefficient=100ppm/°C, Tolerance=5%, Voltage Rating=50V, Case/Package=0402, Composition="Thick Film", Contact Plating=Tin, Depth=0.5mm, Features="Automotive AEC-Q200", Height=0.35mm, Lead Free="Lead Free", Length=1mm, Military Standard=Not, Mount="Surface Mount", Number of Terminations=2, Packaging="Tape and Reel", Power Rating=63mW, Radiation Hardening=No, Termination=SMD/SMT, Voltage Rating (DC)=50V, Weight=2.3E-05oz, Width=0.5mm
R4: library part CMP-2000-00874-2, "100mW Thick Film Resistors 75V ±1% -55℃~+155℃ 2kΩ 0603 Chip Resistor - Surface Mount ROHS/CR-03FA7----2K", Case Code (Imperial)=0603, Case Code (Metric)=1608, Max Operating Temperature=155°C, Max Power Dissipation=100mW, Min Operating Temperature=-55°C, Package Quantity=5000, Resistance=10kR, Resistance Tolerance=0.1%, Resistor Type="Thin Film", Temperature Coefficient=25ppm/°C, Voltage Rating=75V, Case/Package=0603, Construction=Rectangular, Contact Plating=Tin, Depth=0.8mm, Height=0.45mm, Lead Free="Lead Free", Length=1.6mm, Military Standard=Not, Mount="Surface Mount", Number of Pins=2, Number of Terminations=2, Packaging="Tape and Reel", Power Rating=100mW, Radiation Hardening=No, REACH SVHC="No SVHC", RoHS Compliant=Yes, Series=ERA-3A, Size Code=0603, Technology="METAL FILM", Termination=SMD/SMT, Tolerance=0.1%, Voltage Rating (DC)=75V, Width=0.8mm
R6: library part CMP-2002-08122-2, "62.5mW Thick Film Resistors 50V ±100ppm/℃ ±1% -55℃~+155℃ 470Ω 0402 Chip Resistor - Surface Mount ROHS/AC0402FR-07470RL", Case Code (Imperial)=0402, Case Code (Metric)=1005, Max Operating Temperature=155°C, Max Power Dissipation=63mW, Min Operating Temperature=-55°C, Package Quantity=1, Resistance=0mR, Temperature Coefficient=100ppm/°C, Tolerance=5%, Voltage Rating=50V, Case/Package=0402, Composition="Thick Film", Contact Plating=Tin, Depth=0.5mm, Features="Automotive AEC-Q200", Height=0.35mm, Lead Free="Lead Free", Length=1mm, Military Standard=Not, Mount="Surface Mount", Number of Terminations=2, Packaging="Tape and Reel", Power Rating=63mW, Radiation Hardening=No, Termination=SMD/SMT, Voltage Rating (DC)=50V, Weight=2.3E-05oz, Width=0.5mm
R7: library part CMP-2002-08122-2, "63mW Thick Film Resistors 50V ±100ppm/℃ ±1% -55℃~+125℃ 7.5kΩ 0402 Chip Resistor - Surface Mount ROHS/AECR0402F7K50K9", Case Code (Imperial)=0402, Case Code (Metric)=1005, Max Operating Temperature=155°C, Max Power Dissipation=63mW, Min Operating Temperature=-55°C, Package Quantity=1, Resistance=0mR, Temperature Coefficient=100ppm/°C, Tolerance=5%, Voltage Rating=50V, Case/Package=0402, Composition="Thick Film", Contact Plating=Tin, Depth=0.5mm, Features="Automotive AEC-Q200", Height=0.35mm, Lead Free="Lead Free", Length=1mm, Military Standard=Not, Mount="Surface Mount", Number of Terminations=2, Packaging="Tape and Reel", Power Rating=63mW, Radiation Hardening=No, Termination=SMD/SMT, Voltage Rating (DC)=50V, Weight=2.3E-05oz, Width=0.5mm
R8 R11 R12 R13 R16 R25 R26: library part CMP-2002-08122-2, "62.5mW Thick Film Resistors 50V ±100ppm/℃ ±1% -55℃~+155℃ 1kΩ 0402 Chip Resistor - Surface Mount ROHS/RC0402FR-071KL", Case Code (Imperial)=0402, Case Code (Metric)=1005, Max Operating Temperature=155°C, Max Power Dissipation=63mW, Min Operating Temperature=-55°C, Package Quantity=1, Resistance=0mR, Temperature Coefficient=100ppm/°C, Tolerance=5%, Voltage Rating=50V, Case/Package=0402, Composition="Thick Film", Contact Plating=Tin, Depth=0.5mm, Features="Automotive AEC-Q200", Height=0.35mm, Lead Free="Lead Free", Length=1mm, Military Standard=Not, Mount="Surface Mount", Number of Terminations=2, Packaging="Tape and Reel", Power Rating=63mW, Radiation Hardening=No, Termination=SMD/SMT, Voltage Rating (DC)=50V, Weight=2.3E-05oz, Width=0.5mm
R9 R17 R19 R21 R23: library part CMP-2002-08122-2, "62.5mW Thick Film Resistors 50V ±100ppm/℃ ±1% -55℃~+155℃ 22.1kΩ 0402 Chip Resistor - Surface Mount ROHS/RC0402FR-0722K1L", Case Code (Imperial)=0402, Case Code (Metric)=1005, Max Operating Temperature=155°C, Max Power Dissipation=63mW, Min Operating Temperature=-55°C, Package Quantity=1, Resistance=0mR, Temperature Coefficient=100ppm/°C, Tolerance=5%, Voltage Rating=50V, Case/Package=0402, Composition="Thick Film", Contact Plating=Tin, Depth=0.5mm, Features="Automotive AEC-Q200", Height=0.35mm, Lead Free="Lead Free", Length=1mm, Military Standard=Not, Mount="Surface Mount", Number of Terminations=2, Packaging="Tape and Reel", Power Rating=63mW, Radiation Hardening=No, Termination=SMD/SMT, Voltage Rating (DC)=50V, Weight=2.3E-05oz, Width=0.5mm
R10 R18 R20 R22 R24: library part CMP-2002-08122-2, "62.5mW Thin Film Resistor 25V ±0.5% ±50ppm/℃ -55℃~+155℃ 47.5kΩ 0402 Chip Resistor - Surface Mount ROHS/AR02DTD4752", Case Code (Imperial)=0402, Case Code (Metric)=1005, Max Operating Temperature=155°C, Max Power Dissipation=63mW, Min Operating Temperature=-55°C, Package Quantity=1, Resistance=0mR, Temperature Coefficient=100ppm/°C, Tolerance=5%, Voltage Rating=50V, Case/Package=0402, Composition="Thick Film", Contact Plating=Tin, Depth=0.5mm, Features="Automotive AEC-Q200", Height=0.35mm, Lead Free="Lead Free", Length=1mm, Military Standard=Not, Mount="Surface Mount", Number of Terminations=2, Packaging="Tape and Reel", Power Rating=63mW, Radiation Hardening=No, Termination=SMD/SMT, Voltage Rating (DC)=50V, Weight=2.3E-05oz, Width=0.5mm
SW1: library part CMP-31746-000001-1, "SWITCH SLIDE SPDT 0.4VA 28V", Case/Package=SMD/SMT, Max Current Rating=100mA, Max Operating Temperature=85°C, Max Voltage Rating (AC)=28V, Min Operating Temperature=-25°C, Package Quantity=1, Actuator Length=2mm, Actuator Material=Polyphenylene, Actuator Type=Standard, Contact Material=Bronze, Contact Plating=Gold, Contact Style=Shorting, Depth=7.45mm, Electrical Life=10000Cycles, Housing Material=Bronze, Lead Free="Lead Free", Length=10.5mm, Max Voltage Rating (DC)=28V, Mechanical Life=10000Cycles, Mount="Surface Mount", Orientation="Right Angle", Packaging="Tape and Reel", REACH SVHC="No SVHC", RoHS Compliant=Yes, Series=SS3, Switch Function=On-On, Switch Travel=2mm, Termination="Gull Wing", Throw Configuration=SPDT, Voltage Rating (AC)=28V, Voltage Rating (DC)=28V
U1: library part CMP-06276-000046-1, "IC MCU 8BIT 32KB FLASH 32TQFP", Case/Package=TQFP, Frequency=40MHz, Max Operating Temperature=85°C, Min Operating Temperature=-40°C, Core Architecture=PIC, Interface=I2C, Memory Size=32KB, Memory Type=FLASH, Number of I/Os=32, Oscillator Type=Internal, Packaging="Cut Tape", Peripherals="Brown-out Detect/Reset"
X1: library part CMP-2100-03620-1, "Ceramic Resonator, 8 MHz, +/- 0.5%, -20 to 80 degC, 3-Pin SMD, RoHS, Tape and Reel", Capacitance=33pF, Case/Package=Ceramic, Frequency=8MHz, Frequency Stability=0.2%, Frequency Tolerance=0.5%, Manufacturer=Murata, Max Operating Temperature=80degC, Min Operating Temperature=-20degC, Package Description="3-Pin Surface Mount Device, Body 3.2 x 1.3 mm, Pitch 1.2 mm", Package Quantity=1, Package Reference=CSTCE_G_A-3, Composition=Ceramic, Contact Plating=Gold, Datasheet URL=http://www.murata.com/~/media/webrenewal/support/library/catalog/products/timingdevice/ceralock/p16e.ashx, Datasheet Version=42339.0, Height=0.031inch, Lead Free=LeadFree, Length=0.126inch, Load Capacitance=33pF, Manufacturer URL=http://www.murata.com/, Mount=SurfaceMount, Number of Pins=3, Packaging=TapeandReel, REACH SVHC=NoSVHC, RoHSCompliant=True, Self Resonant Frequency=8MHz, Termination=SMD/SMT, Tolerance=0.5%, Width=0.051inch

## Free pads (board coordinates)
  rect 1.4x0.6 smd far side: 2(-11,-9) 2(-11,-7.5) 2(-11,-6) 2(-11,-4.5) 2(-11,-3) 2(-11,-1.5) 2(-11,0) 2(-11,1.5) 2(-11,3) 2(-11,4.5) 2(-11,6) 2(-11,7.5) 2(-11,9) 2(5.9,5.5) 2(5.9,7) 2(5.9,8.5) 2(9.9,5.5) 2(9.9,7) 2(9.9,8.5) 2(10.9,-9) 3(10.9,-5)

## Via types
v1: diameter 8, hole 7.6, Top Layer to Bottom Layer, 4 vias

## Nets (pads, with @x,y where several pads share a name; then routed paths per layer and width w, separated by ;. In a path a pad name is that pad's centre, name@x,y a point inside that pad or via, vN(x,y) a via of type N, cw(c..) or ccw(c..) an arc to the next point about the centre after c; other vN are vias at no path point)
3V3: C8.1 C9.1 C12.2 C13.2 IC3.6 IC4.8 IC4.13 pad.2@9.9,8.5 R25.1 R26.1
5VO: C4.1 C6.1 C7.1 D1.1 DS3.1 IC3.7 pad.2@9.9,5.5 R7.1 R16.2 U1.4 U1.6 U1.18
BAT: C5.1 D2.1 D3.1 D4.1 D5.1 IC2.4 IC2.5 L1.1 R13.1 SW1.1
BAT_N: C2.2 C3.2 IC1.6 pad.3 Q1.2 Q1.3
BAT_P: C3.1 J1.5 pad.2@10.9,-9 R6.1 SW1.2
BOOS_FB: IC2.3 R7.2 R8.2
BOOS_SW: D1.2 IC2.1 L1.2
CHR_CHR: J1.7 R3.1
CHR_PROG: J1.2 R1.1
CHR_SBY: J1.6 R2.1
GND: C1.2 C4.2 C5.2 C6.2 C7.2 C8.2 C9.2 C11.2 C12.1 C13.1 C14.1 IC2.2 IC3.3 IC3.29 IC4.1 IC4.11 IC4.18 J1.1 J1.3 J1.9 J2.5 pad.2@9.9,7 Q1.6 Q1.7 Q2.2 Q3.2 Q4.2 Q5.2 R1.2 R4.2 R5.1 R8.1 R10.1 R14.1 R15.1 R18.1 R20.1 R22.1 U1.3 U1.5 U1.20 U1.21 X1.2
MOTOR_GATE_1: R17.2 U1.1
MOTOR_GATE_2: R19.2 U1.9
MOTOR_GATE_3: R21.2 U1.10
MOTOR_GATE_4: R23.2 U1.13
MOTOR_NEG_1: D2.2 Q2.3
MOTOR_NEG_2: D3.2 Q3.3
MOTOR_NEG_3: D4.2 Q4.3
MOTOR_NEG_4: D5.2 Q5.3
NetC11_1: C11.1 IC4.20
NetC14_2: C14.2 IC4.10
NetDS1_2: DS1.2 R2.2
NetDS2_2: DS2.2 R3.2
NetDS3_2: DS3.2 R5.2
NetDS4_2: DS4.2 R14.2
NetDS5_2: DS5.2 R15.2
NetQ2_1: Q2.1 R17.1 R18.2
NetQ3_1: Q3.1 R19.1 R20.2
NetQ4_1: Q4.1 R21.1 R22.2
NetQ5_1: Q5.1 R23.1 R24.2
NetU1_7: U1.7 X1.1
NetU1_8: U1.8 X1.3
PROT_CS: IC1.2 R4.1
PROT_OC: IC1.3 Q1.5
PROT_OD: IC1.1 Q1.4
PROT_VCC: C2.1 IC1.5 R6.2
TTL_D+: IC3.4 J2.3
TTL_D-: IC3.5 J2.2
TTL_VBUS: IC3.8 R9.2 R10.2
uc_AD0: R13.2 U1.23
uC_DTR: C10.2 IC3.28
uc_IND_1: DS5.1 U1.12
uc_IND_2: DS4.1 U1.11
uc_IRX: U1.32
uc_ITX: U1.2
uc_MISO: U1.16
uc_MOSI: U1.15
uc_RESET: C10.1 pad.2@5.9,5.5 R16.1 U1.29
uc_RX: IC3.26 R11.1 U1.30
uc_RX_OUT: pad.2@5.9,8.5 R12.2
uc_SCK: U1.17
uc_SCL: IC4.23 R26.2 U1.28
uc_SDA: IC4.24 R25.2 U1.27
uc_SS: U1.14
uc_TX: IC3.25 R12.1 U1.31
uc_TX_OUT: pad.2@5.9,7 R11.2
VBUS: C1.1 DS1.1 DS2.1 J1.4 J1.8 J2.1 R9.1
pads on no net: IC1.4 IC2.6 IC3.1 IC3.2 IC3.9 IC3.10 IC3.11 IC3.12 IC3.13 IC3.14 IC3.15 IC3.16 IC3.17 IC3.18 IC3.19 IC3.20 IC3.21 IC3.22 IC3.23 IC3.24 IC3.27 IC4.2 IC4.3 IC4.4 IC4.5 IC4.6 IC4.7 IC4.9 IC4.12 IC4.14 IC4.15 IC4.16 IC4.17 IC4.19 IC4.21 IC4.22 IC4.25 J2.4 J2.6 J2.7 J2.8 J2.9 J2.10 J2.11 Q1.1 Q1.8 R24.1 SW1.3 SW1.4 SW1.5 U1.19 U1.22 U1.24 U1.25 U1.26
copper on no net:
  other v1: -27.5,-27.5 27.5,-27.5 -27.5,27.5 27.5,27.5

## Polygon pours and split planes (outlines as drawn)
GND on GND_TOP (split plane): 657 vertices, not listed, extent -32.017,-32.017 32.017,32.017
GND on GND_BOT (split plane): 657 vertices, not listed, extent -32.017,-32.017 32.017,32.017

## Keep-outs
Keep-Out Layer:
  circle w0.254: c-27.5,-27.5 r5
  circle w0.254: c27.5,-27.5 r5
  circle w0.254: c27.5,27.5 r5
  circle w0.254: c-27.5,27.5 r5
  lines w0.254: -26.5,22.5 cw(c-25.427,15.428) -21.568,21.451 ; -26.432,-22.549 ccw(c-25.359,-15.478) -21.5,-21.5 ; -24,24 -10.5,10.5 ; -22.502,-27.35 cw(c-17.783,-28.712) -21,-25 ; -22.5,-26.5 -6.5,-10.5 ; -22.5,26.5 -7,11 ; -13,10.5 12,10.5 ; -12.5,-9 ccw(c-11.5,-9) -11.5,-10 cw(c-12.25,-10.75) -11.5,-11.5 ; -12.5,9 cw(c-11.5,9) -11.5,10 ; -11.5,-10.5 13.5,-10.5 ; -11.5,11.5 cw(c-12.25,10.75) -11.5,10 ; -10.5,-10.5 -27.5,-27.5 ; -10.5,10 -11.5,10 ; -8.109,12.114 ccw(c-4.109,16.614) -3.564,10.618 ; -8.045,11.996 ccw(c-4.045,16.496) -3.5,10.5 ; -8,-12 cw(c-4,-16.5) -3.455,-10.504 ; 3.455,10.504 ccw(c4,16.5) 8,12 ; 3.5,-10.5 cw(c4.045,-16.496) 8.045,-11.996 ; 7,-11 22.5,-26.5 ; 7,11 22.5,26.5 ; 10.5,-10.5 27.5,-27.5 ; 10.5,10.5 27.5,27.5 ; 11.5,-11.5 cw(c12.25,-10.75) 11.5,-10 ccw(c11.5,-9) 12.5,-9 ; 11.5,11.5 ccw(c12.25,10.75) 11.5,10 cw(c11.5,9) 12.5,9 ; 21.5,21.5 cw(c25.359,15.478) 26.432,22.549 ; 21.568,-21.451 ccw(c25.427,-15.428) 26.5,-22.5 ; -27.5,-27.5 -27.5,27.5 27.5,27.5 ; -27.5,-27.5 27.5,-27.5 ; 27.5,-27.5 27.5,27.5

## Silkscreen, mask and mechanical layers (free items; w line width, h text height)
Bottom Overlay:
  lines w0.254: -35,-17.5 10,-17.5 10,17.5 -35,17.5 -35,-17.5
Mechanical 15:
  lines w0.254: -21.001,-20.999 cw(c-25.488,-15.804) -27,-22.5 ccw(c-27.5,-27.5) -22.475,-27.5 cw(c-17.988,-28.488) -20.945,-24.971 -20.945,-24.945 -8,-12 cw(c-3.75,-17.25) -3.48,-10.501 3.48,-10.501 cw(c3.75,-17.25) 8,-12 20.945,-24.945 20.945,-24.971 cw(c17.988,-28.488) 22.475,-27.5 ccw(c27.5,-27.5) 27,-22.5 cw(c25.488,-15.804) 21.001,-20.999 ; -21.001,20.999 ccw(c-25.488,15.804) -27,22.5 cw(c-27.5,27.5) -22.475,27.5 ccw(c-17.988,28.488) -20.945,24.971 -20.945,24.945 -8,12 ccw(c-3.75,17.25) -3.48,10.501 3.48,10.501 ccw(c3.75,17.25) 8,12 20.945,24.945 20.945,24.971 ccw(c17.988,28.488) 22.475,27.5 cw(c27.5,27.5) 27,22.5 ccw(c25.488,15.804) 21.001,20.999 ; -21,-21 -11.5,-11.5 ccw(c-12.25,-10.75) -11.5,-10 cw(c-11.5,-9) -12.5,-9 -12.5,9 cw(c-11.5,9) -11.5,10 ccw(c-12.25,10.75) -11.5,11.5 -21,21 ; 21,-21 11.5,-11.5 cw(c12.25,-10.75) 11.5,-10 ccw(c11.5,-9) 12.5,-9 12.5,9 ccw(c11.5,9) 11.5,10 cw(c12.25,10.75) 11.5,11.5 21,21

## Text inside footprints (layer, text, board x,y; h text height)
J2: Mechanical 1 "PCB EDGE" at 12.4,7.2 h0.3 r90